# Altium PCB SerreVo_Controller_PCB ASCII REV 1.01.PcbDoc
Units mm, origin at the board's own origin, x right, y up, seen from the top; angles counter-clockwise.
Board outline 123.57 x 47.3 mm, 2 copper layers (Top, Bottom), stack 1.54 mm thick; 72 components, 49 nets, 284 pads, 147 vias.
Unrouted connection lines stored in the file: 24.
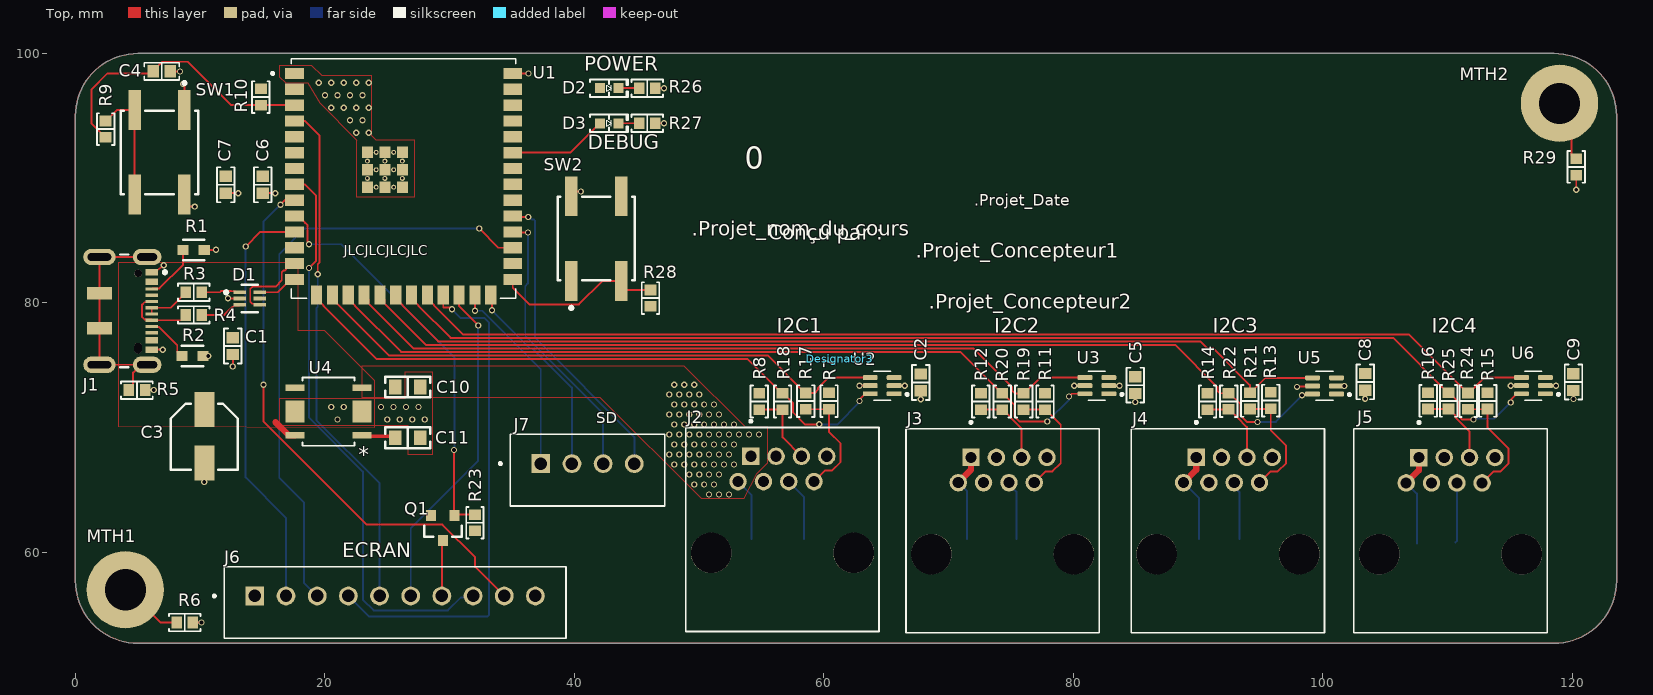
[diagram p0: Top view]
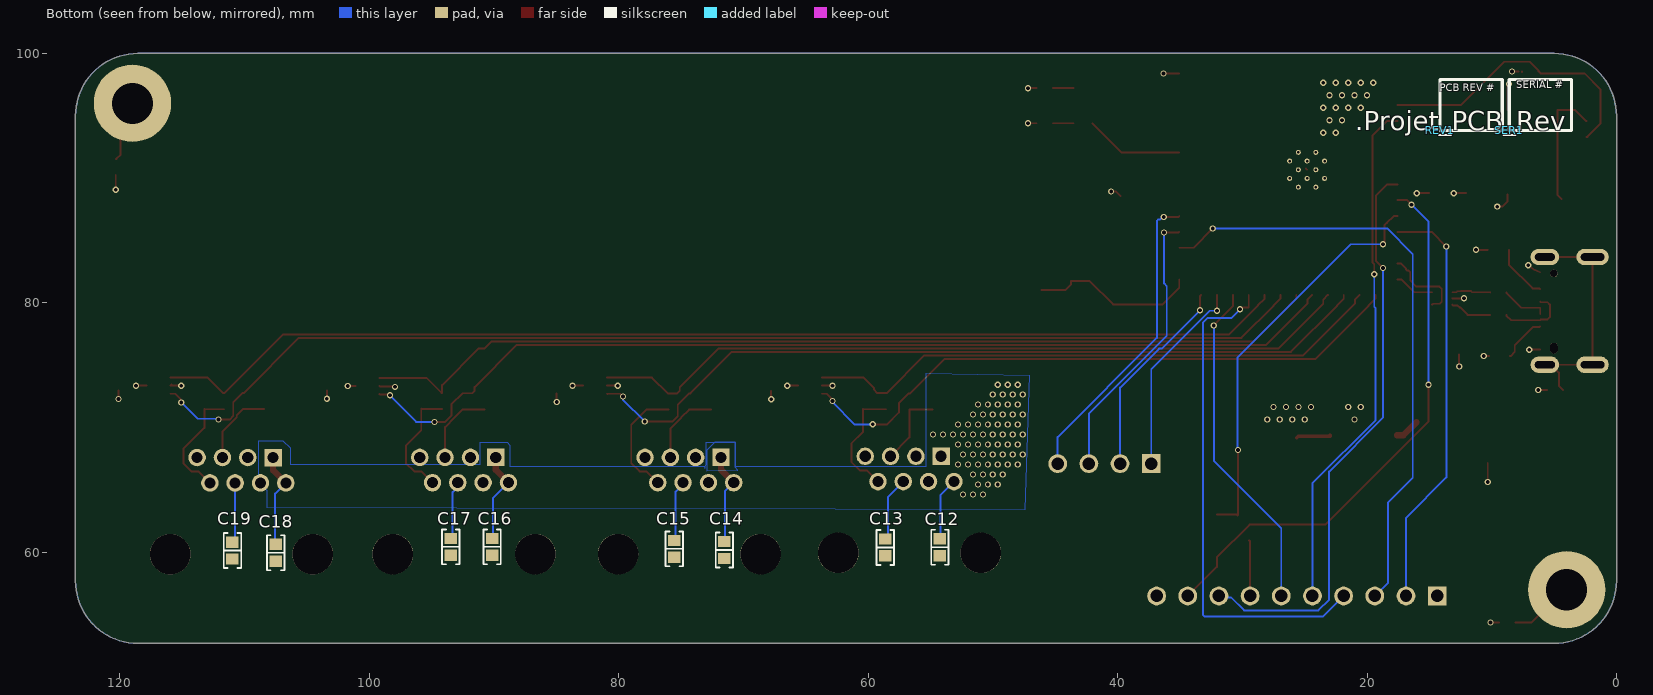
[diagram p1: Bottom view, seen from below]

## Layer stack, top to bottom
Top Solder: solder mask 0.0102, Solder Resist, Dk 3.5
Top: signal copper 0.035
Dielectric 1: core 1.47, FR-4, Dk 4.6
Bottom: signal copper 0.035
Bottom Solder: solder mask 0.0102, Solder Resist, Dk 3.5

## Board outline
0,57.705 0,95 cw(c5,95) 5,100 118.571,100 cw(c118.571,95) 123.571,95 123.571,57.705 cw(c118.571,57.705) 118.571,52.705 5,52.705 cw(c5,57.705)

## Design rules (kind name [scope] priority, off if disabled: settings)
AssemblyTestPointUsage [All] p0: scope1count=1 scope1_0_kind=Board scope1_0_value=Board scope2count=1 scope2_0_kind=Board scope2_0_value=Board commentlength=0
AssemblyTestpoint [All] p0: scope1count=1 scope1_0_kind=Board scope1_0_value=Board scope2count=1 scope2_0_kind=Board scope2_0_value=Board commentlength=0
BoardOutlineClearance [All] p0: scope1count=1 scope1_0_kind=Board scope1_0_value=Board scope2count=1 scope2_0_kind=Board scope2_0_value=Board commentlength=0 gap=0.2
BoardOutlineClearance [All] p1: gap=0.2 ignorepadtopadclearanceinfootprint=FALSE except(0: Arc-SplitContinuation Track-SplitContinuation SMDPad-SplitContinuation THPad-SplitContinuation Via-SplitContinuation Fill-SplitContinuation Poly-SplitContinuation Region-SplitContinuation Text-SplitContinuation)
Clearance [All] p0: scope1count=1 scope1_0_kind=Board scope1_0_value=Board scope2count=1 scope2_0_kind=Board scope2_0_value=Board commentlength=0 gap=0.152
Clearance [All] p1: gap=0.152 ignorepadtopadclearanceinfootprint=FALSE except(0: Arc-Hole Track-Hole SMDPad-Hole THPad-Hole Via-Hole Fill-Hole Poly-Hole Region-Hole Text-Hole; 0.127: Arc-Arc Arc-Track Track-Track SMDPad-Fill SMDPad-Poly SMDPad-Region; 0.2: Arc-SMDPad Track-SMDPad; 0.254: Arc-Via Track-Via Via-Via; 0.33: Arc-THPad Track-THPad; 0.5: THPad-THPad)
ComponentClearance [All] p0: scope1count=1 scope1_0_kind=Board scope1_0_value=Board scope2count=1 scope2_0_kind=Board scope2_0_value=Board commentlength=0 gap=0.102 collisioncheckmode=3
ComponentClearance "Schematic Component Clearance Constraint" [All] p0: scope1count=1 scope1_0_kind=Component scope1_0_value=REV1 scope2count=1 scope2_0_kind=Board scope2_0_value=Board commentlength=0 gap=0 collisioncheckmode=3
ComponentClearance "Schematic Component Clearance Constraint_1" [All] p0: scope1count=1 scope1_0_kind=Component scope1_0_value=SER1 scope2count=1 scope2_0_kind=Board scope2_0_value=Board commentlength=0 gap=0 collisioncheckmode=3
ComponentClearance "Schematic Component Clearance Constraint_1" [InComponent('SER1')] p1: gap=0 collisioncheckmode=3 verticalgap=0 showdistances=FALSE
ComponentClearance "Schematic Component Clearance Constraint" [InComponent('REV1')] p2: gap=0 collisioncheckmode=3 verticalgap=0 showdistances=FALSE
ComponentClearance [All] p3: gap=0.102 collisioncheckmode=3 verticalgap=0.102 showdistances=FALSE
DiffPairsRouting [All] p0: scope1count=1 scope1_0_kind=Board scope1_0_value=Board scope2count=1 scope2_0_kind=Board scope2_0_value=Board commentlength=0
FabricationTestPointUsage [All] p0: scope1count=1 scope1_0_kind=Board scope1_0_value=Board scope2count=1 scope2_0_kind=Board scope2_0_value=Board commentlength=0 valid=0 allowmultiple=FALSE
FabricationTestpoint [All] p0: scope1count=1 scope1_0_kind=Board scope1_0_value=Board scope2count=1 scope2_0_kind=Board scope2_0_value=Board commentlength=0 side=3 testpointundercomponent=TRUE minsize=1.016 maxsize=2.54 preferedsize=1.524 minholesize=0 maxholesize=1.016 preferedholesize=0.813 testpointgrid=0.025
FanoutControl Fanout_Default [All] p0: scope1count=1 scope1_0_kind=Board scope1_0_value=Board scope2count=1 scope2_0_kind=Board scope2_0_value=Board commentlength=30 // Fanout_Default (Default Rule)
FanoutControl Fanout_Small [All] p0 off: scope1count=1 scope1_0_kind=Board scope1_0_value=Board scope2count=1 scope2_0_kind=Board scope2_0_value=Board commentlength=84 // Protel DXP Scope 1 Expression Was: (CompPinCount < 5)   Fanout_Small (Default Rule)
FanoutControl Fanout_SOIC [All] p0 off: scope1count=1 scope1_0_kind=Board scope1_0_value=Board scope2count=1 scope2_0_kind=Board scope2_0_value=Board commentlength=71 // Protel DXP Scope 1 Expression Was: IsSOIC   Fanout_SOIC (Default Rule)
FanoutControl Fanout_LCC [All] p0 off: scope1count=1 scope1_0_kind=Board scope1_0_value=Board scope2count=1 scope2_0_kind=Board scope2_0_value=Board commentlength=69 // Protel DXP Scope 1 Expression Was: IsLCC   Fanout_LCC (Default Rule)
FanoutControl Fanout_BGA [All] p0 off: scope1count=1 scope1_0_kind=Board scope1_0_value=Board scope2count=1 scope2_0_kind=Board scope2_0_value=Board commentlength=69 // Protel DXP Scope 1 Expression Was: IsBGA   Fanout_BGA (Default Rule)
Height [All] p0: scope1count=1 scope1_0_kind=Board scope1_0_value=Board scope2count=1 scope2_0_kind=Board scope2_0_value=Board commentlength=0
HoleSize [All] p0: scope1count=1 scope1_0_kind=Board scope1_0_value=Board scope2count=1 scope2_0_kind=Board scope2_0_value=Board commentlength=0 absolutevalues=TRUE maxlimit=6.3 minlimit=0.3 maxpercent=80.000 minpercent=20.000
HoleSize [All] p1: absolutevalues=TRUE maxlimit=6.3 minlimit=0.3 maxpercent=80.000 minpercent=20.000
HoleToHoleClearance [All] p0: scope1count=1 scope1_0_kind=Board scope1_0_value=Board scope2count=1 scope2_0_kind=Board scope2_0_value=Board commentlength=0
HoleToHoleClearance [All] p1: gap=0.5 allowstackedmicrovias=FALSE
LayerPairs [All] p0: scope1count=1 scope1_0_kind=Board scope1_0_value=Board scope2count=1 scope2_0_kind=Board scope2_0_value=Board commentlength=0 enforce=TRUE
MinimumAnnularRing [All] p0: scope1count=1 scope1_0_kind=Board scope1_0_value=Board scope2count=1 scope2_0_kind=Board scope2_0_value=Board commentlength=0 minimumring=0.1
MinimumAnnularRing [All] p1: minimumring=0.1
MinimumSolderMaskSliver [All] p0: scope1count=1 scope1_0_kind=Board scope1_0_value=Board scope2count=1 scope2_0_kind=Board scope2_0_value=Board commentlength=0
MinimumSolderMaskSliver [All] p1: minsoldermaskwidth=0.1
NetAntennae [All] p0: scope1count=1 scope1_0_kind=Board scope1_0_value=Board scope2count=1 scope2_0_kind=Board scope2_0_value=Board commentlength=0
PasteMaskExpansion [All] p0: scope1count=1 scope1_0_kind=Board scope1_0_value=Board scope2count=1 scope2_0_kind=Board scope2_0_value=Board commentlength=0 expansion=0
PlaneClearance [All] p0: scope1count=1 scope1_0_kind=Board scope1_0_value=Board scope2count=1 scope2_0_kind=Board scope2_0_value=Board commentlength=0 clearance=0.152
PlaneClearance [All] p1: clearance=0.152
PlaneConnect [All] p0: scope1count=1 scope1_0_kind=Board scope1_0_value=Board scope2count=1 scope2_0_kind=Board scope2_0_value=Board commentlength=0 planeconnectstyle=Relief reliefexpansion=0.508 reliefentries=4 reliefconductorwidth=0.254 reliefairgap=0.254
PlaneConnect [All] p1: pad.planeconnectstyle=Relief pad.reliefexpansion=0.508 pad.reliefentries=4 pad.reliefconductorwidth=0.254 pad.reliefairgap=0.254 via.planeconnectstyle=Direct via.reliefexpansion=0.508 via.reliefentries=4 via.reliefconductorwidth=0.254 via.reliefairgap=0.254
PolygonConnect [All] p0: scope1count=1 scope1_0_kind=Board scope1_0_value=Board scope2count=1 scope2_0_kind=Board scope2_0_value=Board commentlength=0 connectstyle=Relief reliefconductorwidth=0.254 reliefentries=4 polygonreliefangle="90 Angle"
PolygonConnect [All] p1: thpad.connectstyle=Relief thpad.reliefconductorwidth=0.254 thpad.reliefentries=4 thpad.polygonreliefangle="90 Angle" thpad.airgapwidth=0.254 smdpad.connectstyle=Direct smdpad.reliefconductorwidth=0.254 smdpad.reliefentries=4 smdpad.polygonreliefangle="90 Angle" smdpad.airgapwidth=0.254 via.connectstyle=Direct via.reliefconductorwidth=0.254 via.reliefentries=4 via.polygonreliefangle="90 Angle" via.airgapwidth=0.254
RoutingCorners [All] p0: scope1count=1 scope1_0_kind=Board scope1_0_value=Board scope2count=1 scope2_0_kind=Board scope2_0_value=Board commentlength=0 cornerstyle=45-Degree minsetback=2.54 maxsetback=2.54
RoutingLayers [All] p0: scope1count=1 scope1_0_kind=Board scope1_0_value=Board scope2count=1 scope2_0_kind=Board scope2_0_value=Board commentlength=0 top layer=Automatic bottom layer=Automatic
RoutingPriority [All] p0: scope1count=1 scope1_0_kind=Board scope1_0_value=Board scope2count=1 scope2_0_kind=Board scope2_0_value=Board commentlength=0
RoutingTopology [All] p0: scope1count=1 scope1_0_kind=Board scope1_0_value=Board scope2count=1 scope2_0_kind=Board scope2_0_value=Board commentlength=0 topology=Shortest
RoutingVias [All] p0: scope1count=1 scope1_0_kind=Board scope1_0_value=Board scope2count=1 scope2_0_kind=Board scope2_0_value=Board commentlength=0 holewidth=0.3 width=0.5 viastyle="Through Hole" minholewidth=0.3 minwidth=0.5 maxholewidth=6.3 maxwidth=6.5
RoutingVias [All] p1: holewidth=0.3 width=0.5 viastyle="Through Hole" minholewidth=0.3 minwidth=0.5 maxholewidth=6.3 maxwidth=6.5
ShortCircuit [All] p0: scope1count=1 scope1_0_kind=Board scope1_0_value=Board scope2count=1 scope2_0_kind=Board scope2_0_value=Board commentlength=0 allowed=FALSE
SilkToBoardRegionClearance [All] p0: scope1count=1 scope1_0_kind=Board scope1_0_value=Board scope2count=1 scope2_0_kind=Board scope2_0_value=Board commentlength=0
SilkToSilkClearance [All] p0: scope1count=1 scope1_0_kind=Board scope1_0_value=Board scope2count=1 scope2_0_kind=Board scope2_0_value=Board commentlength=0
SilkToSilkClearance [All] p1: silktosilkclearance=0.102
SilkToSolderMaskClearance [All] p0 off: scope1count=1 scope1_0_kind=Board scope1_0_value=Board scope2count=1 scope2_0_kind=Board scope2_0_value=Board commentlength=44 // Protel DXP Scope 1 Expression Was: IsPad
SilkToSolderMaskClearance [IsPad] p1: minsilkscreentomaskgap=0.024 clearancetoexposedcopper=FALSE
SolderMaskExpansion [All] p0: scope1count=1 scope1_0_kind=Board scope1_0_value=Board scope2count=1 scope2_0_kind=Board scope2_0_value=Board commentlength=0 expansion=0.051
SolderMaskExpansion SolderMaskExpansion_Via [All] p0 off: scope1count=1 scope1_0_kind=Board scope1_0_value=Board scope2count=1 scope2_0_kind=Board scope2_0_value=Board commentlength=44 expansion=0.102 // Protel DXP Scope 1 Expression Was: isVia
SolderMaskExpansion SolderMaskExpansion_Via [isVia] p1: expansion=0.102 istentingtop=TRUE
SolderMaskExpansion [All] p2: expansion=0.051 istentingtop=FALSE
UnRoutedNet [All] p0: scope1count=1 scope1_0_kind=Board scope1_0_value=Board scope2count=1 scope2_0_kind=Board scope2_0_value=Board commentlength=0
UnpouredPolygon [All] p0: scope1count=1 scope1_0_kind=Board scope1_0_value=Board scope2count=1 scope2_0_kind=Board scope2_0_value=Board commentlength=0
Width [All] p0: scope1count=1 scope1_0_kind=Board scope1_0_value=Board scope2count=1 scope2_0_kind=Board scope2_0_value=Board commentlength=0 maxlimit=25.4 minlimit=0.127 preferedwidth=0.152
Width [All] p1: maxlimit=25.4 minlimit=0.127 preferedwidth=0.152 minimp=50.000000 maximp=50.000000 favimp=50.000000
22 further rules are at their usual default settings.

## Classes and differential pairs
component class TEMPLATE_Connectors: C1 C3 D1 J1 MTH1 MTH2 R1 R2 R3 R4 R5 R6 R29
component class TEMPLATE_Circuit: C2 C4 C5 C6 C7 C9 C10 C11 D2 D3 J2 J3 J4 J5 J6 J7 Q1 R7 R8 R9 R10 R11 R12 R13 R14 R15 R16 R17 R18 R19 R20 R21 R22 R23 R24 R25 R26 SW1 SW2 U1 U2 U3 U4 U5 U6
component class TEMPLATE_Title: REV1 SER1

## Components (designator, comment, footprint, x,y, rotation, side; value= is the part's Value field where it differs from the comment)
C1 "0.1 µF" "CAP 0603_1608" 12.619,76.531 r90 top
C2 "0.012 µF" "CAP 0603_1608" 67.787,73.627 r90 top
C3 "100 µF" "CAP ALSMD 5.3MM H5.4MM" 10.331,69.312 r270 top
C4 "1 µF" "CAP 0603_1608" 6.921,98.558 r0 top
C5 "0.012 µF" "CAP 0603_1608" 84.984,73.4 r90 top
C6 "22µF" "CAP 0603_1608" 15.029,89.474 r90 top
C7 "0.1 µF" "CAP 0603_1608" 12.055,89.474 r90 top
C8 "0.012 µF" "CAP 0603_1608" 103.411,73.67 r90 top
C9 "0.012 µF" "CAP 0603_1608" 120.116,73.649 r90 top
C10 "4.7 µF" "MURATA GRM188 0603_1608" 26.644,69.185 r0 top
C11 "4.7 µF" "MURATA GRM188 0603_1608" 26.644,73.259 r180 top
C12 "47µF" "CAP 0603_1608" 54.254,60.405 r90 bottom
C13 "47µF" "CAP 0603_1608" 58.63,60.395 r90 bottom
C14 "47µF" "CAP 0603_1608" 71.532,60.184 r90 bottom
C15 "47µF" "CAP 0603_1608" 75.552,60.282 r90 bottom
C16 "47µF" "CAP 0603_1608" 90.166,60.44 r90 bottom
C17 "47µF" "CAP 0603_1608" 93.466,60.44 r90 bottom
C18 "47µF" "CAP 0603_1608" 107.508,59.965 r90 bottom
C19 "47µF" "CAP 0603_1608" 110.98,60.139 r90 bottom
D1 "USBLC6-2P6" FP-SOT-666-MFG 13.983,80.355 r0 top
D2 "Green" "LED 0603_1608 GREEN" 42.793,97.215 r0 top
D3 "Red" "LED 0603_1608 RED" 42.793,94.402 r0 top
Designator3 "Comment" STN_STENCIL_TOP_PASTE_181x280 61.271,75.512 r90 top
J1 "Usb-C" FP-DX07S016JA1R1500-MFG 2.921,79.359 r270 top
J2 "SS-60000-007" BEL_SS-60000-007 56.689,65.669 r0 top
J3 "SS-60000-007" BEL_SS-60000-007 74.344,65.583 r0 top
J4 "SS-60000-007" BEL_SS-60000-007 92.408,65.583 r0 top
J5 "SS-60000-007" BEL_SS-60000-007 110.259,65.566 r0 top
J6 "B10B-XH-A(LF)(SN)" JST_B10B-XH-A(LF)(SN) 25.632,55.975 r180 top
J7 "B4B-XH-A" JST_B4B-XH-A 41.063,66.589 r180 top
MTH1 "MTH_M3" MTH_M3#1 4.064,57.15 r0 top
MTH2 "MTH_M3" MTH_M3#2 119.613,96.02 r0 top
Q1 "DMP6350S-7" FP-SOT23-MFG 29.457,61.955 r270 top
R1 "5.1kohms" FP-AC0603-MFG 9.481,84.251 r0 top
R2 "5.1kohms" FP-AC0603-MFG 9.383,75.74 r0 top
R3 "30 Ohms" "RES 0603_1608" 9.481,80.847 r0 top
R4 "30 Ohms" "RES 0603_1608" 9.481,79.032 r0 top
R5 "0 Ohms" "RES 0603_1608" 4.931,73.005 r0 top
R6 "0 Ohms" "RES 0603_1608" 8.766,54.368 r0 top
R7 "330 Ohms" "RES 0603_1608" 60.428,72.128 r90 top
R8 "330 Ohms" "RES 0603_1608" 54.835,72.094 r90 top
R9 "330 Ohms" "RES 0603_1608" 2.421,93.934 r90 top
R10 "10 kOhms" "RES 0603_1608" 14.87,96.504 r270 top
R11 "330 Ohms" "RES 0603_1608" 77.739,72.094 r90 top
R12 "330 Ohms" "RES 0603_1608" 72.601,72.094 r90 top
R13 "330 Ohms" "RES 0603_1608" 95.842,72.168 r90 top
R14 "330 Ohms" "RES 0603_1608" 90.777,72.094 r90 top
R15 "330 Ohms" "RES 0603_1608" 113.237,72.14 r90 top
R16 "330 Ohms" "RES 0603_1608" 108.463,72.14 r90 top
R17 "30 Ohms" "RES 0603_1608" 58.564,72.123 r90 top
R18 "30 Ohms" "RES 0603_1608" 56.7,72.094 r90 top
R19 "30 Ohms" "RES 0603_1608" 76.027,72.094 r90 top
R20 "30 Ohms" "RES 0603_1608" 74.314,72.094 r90 top
R21 "30 Ohms" "RES 0603_1608" 94.17,72.14 r90 top
R22 "30 Ohms" "RES 0603_1608" 92.469,72.107 r90 top
R23 "10 kOhms" "RES 0603_1608" 32.033,62.369 r270 top
R24 "30 Ohms" "RES 0603_1608" 111.672,72.123 r90 top
R25 "30 Ohms" "RES 0603_1608" 110.102,72.14 r90 top
R26 "220 Ohms" "RES 0603_1608" 45.847,97.215 r180 top
R27 "470 Ohms" "RES 0603_1608" 45.847,94.402 r180 top
R28 "10 kOhms" "RES 0603_1608" 46.109,80.384 r90 top
R29 "0 Ohms" "RES 0603_1608" 120.344,90.898 r90 top
REV1 "Revision Cartridge Mini" REV_REVISION_CARTRIDGE_MINI 14.17,93.831 r180 bottom
SER1 "Serial Cartridge MICRO" SER_SERIAL_CARTRIDGE_MICRO 8.609,93.831 r180 bottom
SW1 "EVQ-Q2U01W" FP-EVQ-Q2U01W-MFG 6.738,92.074 r270 top
SW2 "EVQ-Q2U01W" FP-EVQ-Q2U01W-MFG 41.756,85.15 r90 top
U1 "ESP32-S3-WROOM-1U-N16R8" XCVR_ESP32-S3-WROOM-1U-N16R8 26.316,89.984 r0 top
U2 "LTC4311ISC6#TRPBF" SOT65P210X100-6N 64.684,73.363 r180 top
U3 "LTC4311ISC6#TRPBF" SOT65P210X100-6N 81.905,73.363 r180 top
U4 "R1172S331B-E2-FE" HSOP-6_FH006-A-P-SD-2.1_ABL 20.289,71.288 r180 top
U5 "LTC4311ISC6#TRPBF" SOT65P210X100-6N 100.153,73.342 r180 top
U6 "LTC4311ISC6#TRPBF" SOT65P210X100-6N 116.907,73.363 r180 top

## Footprints (in the part's own frame and the unit in brackets; to place one, negate y for a bottom-side part, rotate by r counter-clockwise, add the part's x,y. Pads: shape width x height; smd on the part's side, far side on the other; paste and mask are expansions set on the pad)
BEL_SS-60000-007 [mm]
  rect 1.398x1.398 hole 0.89: 1(-2.535,2.03)
  round 1.398 hole 0.89: 2(-3.555,0) 3(-1.525,0) 4(0.505,0) 5(-0.505,2.03) 6(1.525,2.03) 7(3.555,2.03) 8(2.535,0)
  round 3.25 hole 3.25 unplated: ""(-5.715,-5.72) ""(5.715,-5.72)
  silkscreen extent -7.75,-12.02 7.74,4.94
"CAP 0603_1608" [mm] "Chip Capacitor, 2-Leads, Body 1.60x0.80mm, IPC Medium Density"
  rect 0.9x1 smd: 1(-0.675,0) 2(0.675,0)
  silkscreen extent -1.4,-0.7 1.4,0.7
"CAP ALSMD 5.3MM H5.4MM" [mm] "Aluminum Electrolytic Capacitor, Body 5.30x5.30x5.40mm, IPC Low Density"
  rect 2.8x1.6 smd: 1(-2.15,0) 2(2.15,0)
  silkscreen extent -2.6,-2.7 2.7,2.7
FP-AC0603-MFG [mm]
  rect 0.9x0.8 smd paste+0 mask+0: 1(-0.85,0) 2(0.85,0)
  silkscreen extent -0.85,-0.83 0.85,0.82
FP-DX07S016JA1R1500-MFG [mm]
  rrect100% 1.3x2.3 hole 1.6 slot 0.6 at 0 deg paste-1000 mask+0: 1(-4.32,2.825) 2(4.32,2.825)
  rrect100% 1.3x2.6 hole 1.9 slot 0.6 at 0 deg paste-1000 mask+0: 3(-4.32,-1) 6(4.32,-1)
  rect 1x2 smd paste+0 mask+0: 4(-1.4,-1) 5(1.4,-1)
  rect 0.52x1 smd paste+0 mask+0: A1/B12(-3.1,3.2) A4/B9(-2.35,3.2) A12/B1(3.1,3.2) B4/A9(2.35,3.2)
  rect 0.27x1 smd paste+0 mask+0: A5(-1.75,3.2) A6(-0.25,3.2) A7(0.75,3.2) A8(1.75,3.2) B5(1.25,3.2) B6(0.25,3.2) B7(-0.75,3.2) B8(-1.25,3.2)
  round 0.6 hole 0.6 unplated paste-1000 mask+0: ""(-3,2.1)
  rrect100% 0.85x0.6 hole 0.6 slot 0.85 at 0 deg unplated paste-1000 mask+0: ""(3,2.1)
  silkscreen extent -4.52,0.67 4.52,4.38
FP-EVQ-Q2U01W-MFG [mm]
  rect 3.2x1 smd paste+0 mask+0: A(-3.4,2) A'(3.4,2) B(-3.4,-2) B'(3.4,-2)
  silkscreen extent -5.67,-3.1 3.35,3.1
FP-SOT23-MFG [mm]
  rect 0.9x0.8 smd paste+0 mask+0: 1(-1,0.95) 2(-1,-0.95) 3(1,0)
  silkscreen extent -0.18,-1.5 0.7,1.5
FP-SOT-666-MFG [mm]
  rect 0.99x0.3 smd paste+0 mask+0: 1(-0.805,0.5) 2(-0.805,0) 3(-0.805,-0.5) 4(0.805,-0.5) 5(0.805,0) 6(0.805,0.5)
  silkscreen extent -2.02,-1.1 0.65,1.1
HSOP-6_FH006-A-P-SD-2.1_ABL [mil]
  rect 60x20 smd paste+0 mask+0: 1(-106,75.2) 3(-106,-75.2) 4(106,-75.2) 6(106,75.2)
  rect 60x70 smd paste+0 mask+0: 2(-106,0) 5(106,0)
  silkscreen extent -82,-108 82,108
JST_B4B-XH-A [mm]
  rect 1.508x1.508 / inner round 1.508 / far side rect 1.508x1.508 hole 1: 1(3.75,-0.525)
  round 1.508 hole 1: 2(1.25,-0.525) 3(-1.25,-0.525) 4(-3.75,-0.525)
  silkscreen extent -6.2,-2.88 7.1,2.87
JST_B10B-XH-A(LF)(SN) [mm]
  rect 1.508x1.508 / inner round 1.508 / far side rect 1.508x1.508 hole 1: 1(11.25,-0.525)
  round 1.508 hole 1: 2(8.75,-0.525) 3(6.25,-0.525) 4(3.75,-0.525) 5(1.25,-0.525) 6(-1.25,-0.525) 7(-3.75,-0.525) 8(-6.25,-0.525) 9(-8.75,-0.525) 10(-11.25,-0.525)
  silkscreen extent -13.7,-2.87 14.6,2.88
"LED 0603_1608 GREEN" [mm] "Chip Diode, 2-Leads, Body 1.60x0.80mm, IPC Medium Density"
  rect 0.8x0.8 smd: 1(-0.75,0) 2(0.75,0)
  silkscreen extent -1.52,-0.7 1.52,0.7
"LED 0603_1608 RED" [mm] "Chip Diode, 2-Leads, Body 1.60x0.80mm, IPC Medium Density"
  rect 0.8x0.8 smd: 1(-0.75,0) 2(0.75,0)
  silkscreen extent -1.52,-0.7 1.52,0.7
MTH_M3#1 [mm] "Mounting Hole Metric M3"
  round 6.2 hole 3.3 paste-7.62 mask+0: 1(-0.064,-0.15)
MTH_M3#2 [mm] "Mounting Hole Metric M3"
  round 6.2 hole 3.3 paste-7.62 mask+0: 1(-0.613,-0.02)
"MURATA GRM188 0603_1608" [mm] "Chip Capacitor, 2-Leads, Body 1.60x0.80mm"
  rect 1x1.2 smd: 1(-1,0) 2(1,0)
  silkscreen extent -1.8,-0.82 1.8,0.82
"RES 0603_1608" [mm] "Chip Resistor, 2-Leads, Body 1.60x0.80mm, IPC Medium Density"
  rect 0.85x0.95 smd: 1(-0.65,0) 2(0.65,0)
  silkscreen extent -1.27,-0.7 1.27,0.7
REV_REVISION_CARTRIDGE_MINI [mm]
  silkscreen extent 0,0 5,4.08
SER_SERIAL_CARTRIDGE_MICRO [mm]
  silkscreen extent 0,0 5,4.08
SOT65P210X100-6N [mm]
  rrect50% 1.19x0.4 smd: 1(-0.96,0.65) 2(-0.96,0) 3(-0.96,-0.65) 4(0.96,-0.65) 5(0.96,0) 6(0.96,0.65)
  silkscreen extent -2.1,-1.16 0.68,1.16
STN_STENCIL_TOP_PASTE_181x280 [mm]
XCVR_ESP32-S3-WROOM-1U-N16R8 [mm]
  rect 1.5x0.9 smd: 1(-8.75,8.41) 2(-8.75,7.14) 3(-8.75,5.87) 4(-8.75,4.6) 5(-8.75,3.33) 6(-8.75,2.06) 7(-8.75,0.79) 8(-8.75,-0.48) 9(-8.75,-1.75) 10(-8.75,-3.02) 11(-8.75,-4.29) 12(-8.75,-5.56) 13(-8.75,-6.83) 14(-8.75,-8.1) 27(8.75,-8.1) 28(8.75,-6.83) 29(8.75,-5.56) 30(8.75,-4.29) 31(8.75,-3.02) 32(8.75,-1.75) 33(8.75,-0.48) 34(8.75,0.79) 35(8.75,2.06) 36(8.75,3.33) 37(8.75,4.6) 38(8.75,5.87) 39(8.75,7.14) 40(8.75,8.41)
  rect 0.9x1.5 smd: 15(-6.985,-9.35) 16(-5.715,-9.35) 17(-4.445,-9.35) 18(-3.175,-9.35) 19(-1.905,-9.35) 20(-0.635,-9.35) 21(0.635,-9.35) 22(1.905,-9.35) 23(3.175,-9.35) 24(4.445,-9.35) 25(5.715,-9.35) 26(6.985,-9.35)
  rect 0.9x0.9 smd: 41_1(-2.9,2.09) 41_2(-1.5,2.09) 41_3(-0.1,2.09) 41_4(-2.9,0.69) 41_5(-1.5,0.69) 41_6(-0.1,0.69) 41_7(-2.9,-0.71) 41_8(-1.5,-0.71) 41_9(-0.1,-0.71)
  round 0.4 hole 0.2 mask+0: 41_10(-2.2,2.09) 41_11(-0.8,2.09) 41_12(-2.9,1.39) 41_13(-1.5,1.39) 41_14(-0.1,1.39) 41_15(-2.2,0.69) 41_16(-0.8,0.69) 41_17(-2.9,-0.01) 41_18(-1.5,-0.01) 41_19(-0.1,-0.01) 41_20(-2.2,-0.71) 41_21(-0.8,-0.71)
  silkscreen extent -10.6,-9.6 9,9.6

## Part data
C1: library part KGM15AR71C104MM, "CAP CER 0.1UF 16V X7R 0603"
C2 C5 C8 C9: library part CC0603KRX7R7BB123, "CAP CER 0.012UF 16V X7R 0603"
C3: library part EEE-1AA101WR, "CAP ALUM 100UF 20% 10V SMD"
C4: library part C0603X105M4RACAUTO, "CAP CER 1UF 16V X7R 0603"
C6: library part 06036D226MAT2A, "CAP CER 22UF 6.3V X5R 0603"
C7: library part C0603C104M4RAC7411, "CAP CER 0.1UF 16V X7R 0603"
C10 C11: library part GRM188C81C475KE11D, "CAP CER 4.7UF 16V X6S 0603"
C12 C13 C14 C15 C16 C17 C18 C19: library part 06036D476MAT2A, "CAP CER 47UF 6.3V X5R 0603"
D1: library part CMP-12225-000058-1, "TVS DIODE 5.25V 17V SOT666"
D2: library part SML-D12P8WT86, "LED GREEN DIFFUSED 0603 SMD"
D3: library part SML-D12U1WT86, "LED RED DIFFUSED 1608 SMD"
J1: library part CMP-19038-000003-1, "CONN RCP USB2.0 TYP C 24P SMD RA"
J2 J3 J4 J5: "Jack Modular Connector 8p8c _RJ45, Ethernet_ Vertical Unshielded Cat6"
J6: "Connector Header Through Hole 10 position 0.098 (2.50mm)"
MTH1 MTH2: library part CMP-006-000008-1, "MTH - MOUNTING HOLE M3 PLATED - M3"
Q1: library part CMP-12801-000018-2, "MOSFET P-CHA 60V 720MW SOT23"
R1 R2: library part CMP-03412-025080-2, "RES 5.1KO 1.00% 0.1W 0603"
R3 R4 R17 R18 R19 R20 R21 R22 R24 R25: library part ESR03EZPJ300, "RES SMD 30 OHM 5% 1/4W 0603"
R5 R6 R29: library part CR0603AJ/-000EAS, "RESA-AS 0603 0R JUMPER 100MW"
R7 R8 R9 R11 R12 R13 R14 R15 R16: library part CRGH0603F330R, "RES SMD 330 OHM 1% 1/5W 0603"
R10 R23 R28: library part RCS060310K0JNEA, "RES SMD 10K OHM 5% 1/4W 0603"
R26: library part CR0603-FX-2200ELF, "RES SMD 220 OHM 1% 1/10W 0603"
R27: library part ERJ-3EKF4700V, "RES SMD 470 OHM 1% 1/10W 0603"
REV1: library part REV_REVISION_CARTRIDGE_MINI, "REV - REVISION CARTRIDGE MINI"
SER1: library part SER_SERIAL_CARTRIDGE_MICRO, "SER - SERIAL CARTRIDGE MICRO"
SW1 SW2: library part CMP-05618-000050-1, "SWITCH TACTILE SPST-NO 0.02A 15V"
U1: "Bluetooth, WiFi 802.11b/g/n, Bluetooth v5.0 Transceiver Module 2.4GHz Antenna Not Included, U.FL Surface Mount"
U2 U3 U5 U6: "Low Voltage I2C/SMBus Accelerator"
U4: library part S-1172B33-E6T1U, "No Description Available"

## Via types
v1: diameter 0.5, hole 0.3, Top to Bottom, tented both sides, 147 vias

## Nets (pads, with @x,y where several pads share a name; then routed paths per layer and width w, separated by ;. In a path a pad name is that pad's centre, name@x,y a point inside that pad or via, vN(x,y) a via of type N, cw(c..) or ccw(c..) an arc to the next point about the centre after c; other vN are vias at no path point)
3V3: C2.2 C5.2 C6.2 C7.2 C8.2 C9.2 C10.1 C13.2 C15.2 C17.2 C19.2 D2.1 J2.3 J2.4 J3.3 J3.4 J4.3 J4.4 J5.3 J5.4 J6.1 Q1.2 R7.2 R8.2 R10.1 R11.2 R12.2 R13.2 R14.2 R15.2 R16.2 R23.2 R28.1 U1.2 U2.1 U2.3 U3.1 U3.3 U4.1 U5.1 U5.3 U6.1 U6.3 | length 22.1
  Top w0.3: U4.1 22.957,69.312 25.517,69.312 C10.1
  Bottom w0.152: J2.4 58.431,64.432 C13.2@58.431,61.08 ; J3.4 74.849,65.455 75.441,64.863 C15.2@75.441,61.08 ; J4.4 92.913,65.246 93.325,64.833 C17.2@93.325,61.08 ; C19.2@110.656,60.795 110.764,60.903 J5.4
BOOT_MCU: R28.2 SW2.B U1.27 | length 13.5
  Top w0.152: U1.27 35.066,81.206 36.397,79.874 40.371,79.874 42.247,81.75 SW2.B 43.756,81.458 44.18,81.034 R28.2
Debug: D3.1 U1.35 | length 8
  Top w0.152: U1.35 39.685,92.044 D3.1
EN: C4.1 R9.1 R10.2 U1.3 | length 23
  Top w0.152: R9.1 2.391,93.314 2.341,93.314 1.271,94.384 1.271,97.096 2.57,98.394 6.082,98.394 C4.1 6.246,98.608 6.972,99.334 9.011,99.334 12.491,95.854 R10.2 U1.3
GND: C1.1 C2.1 C3.2 C4.2 C5.1 C6.1 C7.1 C8.1 C9.1 C10.2 C11.1 C12.1 C13.1 C14.1 C15.1 C16.1 C17.1 C18.1 C19.1 D1.2 J1.A1/B12 J1.A12/B1 J2.5 J2.7 J3.5 J3.7 J4.5 J4.7 J5.5 J5.7 J6.10 R1.2 R2.2 R5.2 R6.2 R26.1 R27.1 R29.1 SW1.A SW1.A' SW2.A' U1.1 U1.40 U1.41_1 U1.41_2 U1.41_3 U1.41_4 U1.41_5 U1.41_6 U1.41_7 U1.41_8 U1.41_9 U2.2 U2.5 U3.2 U3.5 U4.2 U4.5 U5.2 U5.5 U6.2 U6.5 | length 29.3
  Top w0.152: R5.2 v1(6.281,73.005) ; J1.A12/B1 6.971,76.259 v1(6.996,76.234) ; J1.A1/B12 6.545,82.643 6.738,82.744 ccw(c6.246,83.679) v1(7.075,83.025) ; C4.2@7.596,98.508 C4.2 ; C4.2@7.874,98.552 v1(8.382,98.552) ; v1@8.545,97.559 v1(8.631,97.559) 8.738,97.452 SW1.A ; SW1.A' 8.738,88.142 9.161,87.718 v1(9.567,87.718) ; R6.2 v1(10.116,54.368) ; R2.2 v1(10.655,75.74) ; v1(10.331,65.637) C3.2 ; R1.2 v1(11.27,84.251) ; C7.1 v1(13.061,88.799) ; v1(12.234,80.372) 12.243,80.364 13.169,80.364 D1.2 ; v1(12.619,74.895) C1.1 ; C6.1 v1(16.023,88.799) ; U1.41_5 U1.41_5@24.91,90.768 ; U1.40 v1(36.322,98.394) ; SW2.A' 40.133,88.927 v1(40.527,88.927) ; R27.1 v1(47.197,94.402) ; R26.1 v1(47.197,97.215) ; v1(62.874,73.363) U2.5 ; U2.2 v1(66.494,73.363) ; v1(67.787,72.277) C2.1 ; v1(80.095,73.363) U3.5 ; U3.2 v1(83.715,73.363) ; v1(84.984,72.05) C5.1 ; v1(97.941,73.265) 97.98,73.303 99.154,73.303 U5.5 ; U5.2 v1(101.739,73.342) ; v1(103.411,72.32) C8.1 ; v1(115.097,73.363) U6.5 U6.5@115.847,73.463 ; U6.2 v1(118.717,73.363) ; v1(120.116,72.299) C9.1 ; v1(120.344,89.068) R29.1
  other v1: 21.009,70.644 25.009,70.644 26.009,70.644 27.009,70.644 28.009,70.644 20.509,71.644 21.509,71.644 24.509,71.644 25.509,71.644 26.509,71.644 27.509,71.644 22.509,93.644 23.509,93.644 22.009,94.644 23.009,94.644 20.509,95.644 21.509,95.644 22.509,95.644 23.509,95.644 20.009,96.644 21.009,96.644 22.009,96.644 23.009,96.644 19.509,97.644 20.509,97.644 21.509,97.644 22.509,97.644 23.509,97.644
NetD2_2: D2.2 R26.2 | length 1.7
  Top w0.152: D2.2 R26.2
NetD3_2: D3.2 R27.2 | length 1.7
  Top w0.152: D3.2 R27.2
NetJ1_1: J1.1 J1.2 J1.3 J1.4 J1.5 J1.6 R5.1 | length 18.7
  Top w0.152: R5.1 4.63,73.354 4.63,74.413 J1.2@5.256,75.039 ; J1.2 J1.2@5.256,75.039 ; J1.1 J1.3 J1.4 J1.5 J1.6 J1.2@5.256,75.039
NetJ1_A5: J1.A5 R1.1 | length 4.5
  Top w0.152: J1.A5 6.18,81.168 6.73,81.168 8.631,83.068 R1.1
NetJ1_A6: J1.A6 J1.B6 R3.1 | length 3.8
  Top w0.152: J1.B6 J1.A6 7.643,79.609 8.831,80.797 R3.1
NetJ1_A7: J1.A7 J1.B7 R4.1 | length 5.7
  Top w0.152: J1.B7 6.062,80.05 5.537,80.05 5.345,79.858 5.345,78.86 5.537,78.668 6.062,78.668 J1.A7 8.458,78.609 8.831,78.982 R4.1
NetJ1_B5: J1.B5 R2.1 | length 3.7
  Top w0.152: J1.B5 6.18,78.05 6.705,78.05 8.159,76.596 8.159,76.064 8.483,75.74 R2.1
NetJ2_6: J2.6 R8.1 R18.1 | length 6.2
  Top w0.152: R8.1 R18.1 56.7,69.213 J2.6
NetJ2_8: J2.8 R7.1 R17.1 | length 9.3
  Top w0.152: R17.1 60.423,71.473 R7.1 60.428,69.646 61.349,68.725 61.349,67.241 60.682,66.574 60.129,66.574 J2.8
NetJ3_6: J3.6 R12.1 R20.1 | length 6.2
  Top w0.152: R12.1 R20.1 74.364,71.444 74.996,70.812 74.996,70.789 75.869,69.916 J3.6
NetJ3_8: J3.8 R11.1 R19.1 | length 9.3
  Top w0.152: R19.1 R11.1 77.789,71.444 79.004,70.229 79.004,67.155 78.337,66.488 77.784,66.488 J3.8
NetJ4_6: J4.6 R14.1 R22.1 | length 6.2
  Top w0.152: R14.1 92.469,71.444 92.506,71.444 92.519,71.457 93.139,70.836 93.139,70.834 93.933,70.041 J4.6
NetJ4_8: J4.8 R13.1 R21.1 | length 9.3
  Top w0.152: R21.1 95.814,71.49 R13.1 95.842,69.775 97.068,68.549 97.068,67.155 96.401,66.488 95.848,66.488 J4.8
NetJ5_6: J5.6 R16.1 R25.1 | length 6.3
  Top w0.152: R16.1 R25.1 110.152,71.49 110.641,71.001 110.641,70.817 111.784,69.674 J5.6
NetJ5_8: J5.8 R15.1 R24.1 | length 9.4
  Top w0.152: R24.1 113.22,71.473 R15.1 113.237,69.981 114.92,68.298 114.92,67.138 114.253,66.472 113.7,66.472 J5.8
NetMTH1_1: MTH1.1 R6.1 | length 5.2
  Top w0.152: MTH1.1@4.064,57.15 6.846,54.368 R6.1
NetMTH2_1: MTH2.1 R29.2 | length 5
  Top w0.152: MTH2.1 119.945,95.055 119.945,91.897 120.294,91.548 R29.2
NetR9_2: R9.2 SW1.B SW1.B' | length 10
  Top w0.152: R9.2 2.471,94.584 3.361,95.474 SW1.B SW1.B' SW1.B'@4.392,88.328
SCL1: R18.2 U1.15 U2.6 | length 50.5
  Top w0.152: U1.15 19.331,80.334 19.875,79.79 19.875,79.77 24.133,75.512 53.882,75.512 56.65,72.744 R18.2 56.75,72.744 57.536,71.957 57.536,71.21 58.487,70.259 v1(59.638,70.259) ; v1(62.86,72.129) 62.86,72.245 63.329,72.713 U2.6
  Bottom w0.152: v1(59.638,70.259) 61.106,70.259 62.86,72.013 v1(62.86,72.129)
SCL2: R20.2 U1.17 U3.6 | length 65.1
  Top w0.152: U1.17 21.871,80.334 22.415,79.79 22.415,79.77 26.114,76.07 70.938,76.07 74.264,72.744 R20.2 74.364,72.744 75.275,71.833 75.275,70.905 75.689,70.491 v1(77.922,70.491) ; v1(79.676,72.498) 79.891,72.713 U3.6 U3.6@80.908,72.677
  Bottom w0.152: v1(77.922,70.491) 79.676,72.245 v1(79.676,72.498)
SCL3: R22.2 U1.19 U5.6 | length 80.8
  Top w0.152: U1.19 24.785,80.26 24.785,79.94 28.096,76.629 72.115,76.629 72.117,76.627 88.185,76.627 91.566,73.246 91.566,72.956 91.765,72.757 R22.2 92.519,72.757 93.419,71.857 93.419,70.95 93.916,70.452 v1(94.773,70.452) ; v1(98.343,72.591) 98.394,72.641 99.142,72.641 U5.6
  Bottom w0.152: v1(94.773,70.452) 96.254,70.452 98.343,72.541 v1(98.343,72.591)
SCL4: R25.2 U1.21 U6.6 | length 95
  Top w0.152: U1.21 26.951,80.334 27.495,79.79 27.495,79.77 30.077,77.188 105.654,77.188 110.052,72.79 R25.2 110.152,72.79 110.921,72.021 110.921,70.933 111.209,70.645 v1(112.102,70.645) ; v1(115.083,72.013) 115.15,72.08 115.15,72.311 115.552,72.713 U6.6
  Bottom w0.152: v1(112.102,70.645) 112.169,70.712 113.782,70.712 v1(115.083,72.013)
SD_CS: J7.4 U1.31 | length 24.7
  Top w0.152: U1.31 35.138,86.892 v1(36.308,86.892)
  Bottom w0.152: v1(36.308,86.892) 36.402,86.892 36.618,86.677 36.756,86.677 36.864,86.569 36.864,77.193 44.813,69.244 J7.4
SD_MISO: J7.3 U1.30 | length 22.4
  Top w0.152: U1.30 35.11,85.65 v1(36.283,85.65)
  Bottom w0.152: v1(36.283,85.65) 36.283,81.56 36.066,81.343 36.066,77.347 42.313,71.1 J7.3
SD_MOSI: J7.2 U1.26 | length 16.3
  Top w0.152: U1.26 33.398,80.537 v1(33.398,79.411)
  Bottom w0.152: v1(33.398,79.411) 36.474,76.335 36.683,76.335 39.813,73.205 J7.2
SD_SCK: J7.1 U1.25 | length 16.1
  Top w0.152: U1.25 32.033,80.632 v1(32.033,79.372)
  Bottom w0.152: v1(32.033,79.372) 32.616,79.372 34.703,77.285 34.708,77.285 37.313,74.68 J7.1
SDA1: R17.2 U1.16 U2.4 | length 47.2
  Top w0.152: U1.16 20.975,80.26 20.975,79.94 25.124,75.791 55.496,75.791 58.514,72.773 R17.2 59.267,72.773 59.553,73.059 59.553,73.194 60.373,74.013 U2.4
SDA2: R19.2 U1.18 U3.4 | length 62
  Top w0.152: U1.18 23.515,80.26 23.515,79.94 27.105,76.35 71.999,76.35 75.113,73.235 75.113,72.954 75.323,72.744 R19.2 76.077,72.744 77.346,74.013 U3.4
SDA3: R21.2 U1.20 U5.4 | length 77.8
  Top w0.152: U1.20 25.681,80.334 26.225,79.79 26.225,79.77 29.086,76.909 90.192,76.909 90.751,76.35 91.231,76.35 94.17,73.411 R21.2 94.22,72.79 95.422,73.992 U5.4
SDA4: R24.2 U1.22 U6.4 | length 91.7
  Top w0.152: U1.22 28.221,80.334 28.765,79.79 28.765,79.77 31.065,77.47 106.924,77.47 111.622,72.773 R24.2 111.722,72.773 112.962,74.013 U6.4
TFT&TOUCH_MISO: J6.8 U1.8 | length 46.3
  Top w0.152: U1.8 18.399,89.504 19.299,88.605 19.299,83.369 v1(18.733,82.804)
  Bottom w0.152: v1(18.733,82.804) 18.729,82.8 18.729,70.792 23.042,66.479 23.042,56.199 23.902,55.34 29.863,55.34 30.9,56.376 31.865,56.376 J6.8@32.004,56.515
TFT&TOUCH_MOSI: J6.5 U1.4 | length 41.6
  Top w0.152: U1.4 18.399,94.584 19.578,93.405 19.578,83.254 19.431,83.107 v1(19.431,82.296)
  Bottom w0.152: v1(19.431,82.296) 19.431,79.677 19.313,79.559 19.313,70.603 24.382,65.534 J6.5
TFT&TOUCH_SCK: J6.6 U1.24 | length 27.1
  Top w0.152: U1.24 30.761,79.726 v1(32.293,78.194)
  Bottom w0.152: J6.6 26.882,61.923 32.293,67.334 v1(32.293,78.194) 32.293,78.197 v1@32.258,78.232
TFT_BL: Q1.1 R23.1 U1.10 | length 32.7
  Top w0.152: U1.10 17.866,86.964 18.41,86.42 18.43,86.42 18.592,86.259 18.592,84.922 18.718,84.795 v1(18.718,84.701) ; v1(30.353,68.199) 30.353,63.01 Q1.1 30.471,63.019 R23.1
  Bottom w0.152: v1(18.718,84.701) 21.293,84.701 30.407,75.587 30.407,68.253 v1(30.353,68.199)
TFT_CS: J6.2 U1.11 | length 33.8
  Top w0.152: v1(13.649,84.519) 14.824,85.694 U1.11
  Bottom w0.152: v1(13.649,84.519) 13.649,66.002 16.882,62.769 J6.2
TFT_DC: J6.4 U1.23 | length 40.6
  Top w0.152: U1.23 29.491,79.617 30.058,79.617 v1(30.185,79.49)
  Bottom w0.152: J6.4 23.518,54.864 33.058,54.864 33.147,54.953 33.147,78.446 32.815,78.779 30.896,78.779 v1(30.185,79.49)
TFT_LED: J6.7 Q1.3 | length 4.5
  Top w0.152: J6.7 29.382,60.88 Q1.3
TFT_RST: J6.3 U1.29 | length 48.9
  Top w0.152: v1(32.369,85.967) 33.912,84.424 U1.29
  Bottom w0.152: J6.3 18.323,57.559 18.323,63.996 16.342,65.977 16.342,83.909 18.399,85.967 v1(32.369,85.967)
TOUCH_CS: J6.9 U1.9 | length 44.8
  Top w0.152: v1@15.113,73.406 15.072,73.365 15.072,70.496 23.339,62.229 29.424,62.229 32.047,59.606 32.047,58.835 J6.9 ; v1(16.436,87.872) 16.799,88.234 U1.9
  Bottom w0.152: v1(15.072,73.445) 15.072,86.507 v1(16.436,87.872)
Usb1_N: D1.3 R4.2 | length 3.4
  Top w0.152: R4.2 11.941,79.032 12.539,79.63 12.583,79.63 12.734,79.781 13.104,79.781 D1.3
Usb1_P: D1.1 R3.2 | length 3.1
  Top w0.152: R3.2 10.139,80.855 11.576,80.855 11.673,80.952 12.475,80.952 12.498,80.929 12.759,80.929 12.833,80.855 D1.1
UsbData_N: D1.4 U1.13 | length 6.7
  Top w0.152: D1.4 14.714,79.929 14.178,79.929 14.017,80.091 14.017,81.119 14.202,81.305 16.046,81.305 16.54,81.798 16.54,82.449 16.702,82.61 16.803,82.61 16.892,82.7 16.892,82.78 17.266,83.154 U1.13
UsbData_P: D1.6 U1.14 | length 3.2
  Top w0.152: D1.6 16.237,80.855 17.266,81.884 U1.14
VCC: C1.2 C3.1 C11.2 C12.2 C14.2 C16.2 C18.2 D1.5 J1.A4/B9 J1.B4/A9 J2.1 J2.2 J3.1 J3.2 J4.1 J4.2 J5.1 J5.2 U4.3 U4.6 | length 29.4
  Top w0.5: 16.042,70.425 17.088,69.378 U4.6 ; J3.2 71.809,66.603 J3.1 ; J4.2 89.873,66.603 J4.1 ; J5.2 107.724,66.586 J5.1
  Bottom w0.152: J2.2 54.211,64.591 C12.2@54.211,61.08 ; J3.2 71.494,64.878 C14.2@71.494,61.08 ; J4.2 90.077,64.359 C16.2@90.077,61.08 ; J5.2 107.557,64.714 C18.2@107.557,60.697
  other v1: 50.81,64.645 51.61,64.645 52.41,64.645 49.61,65.445 50.41,65.445 51.21,65.445 49.21,66.245 50.01,66.245 50.81,66.245 51.61,66.245 48.01,67.045 48.81,67.045 49.61,67.045 50.41,67.045 51.21,67.045 52.01,67.045 52.81,67.045 47.61,67.845 48.41,67.845 49.21,67.845 50.01,67.845 50.81,67.845 51.61,67.845 52.41,67.845 48.01,68.645 48.81,68.645 49.61,68.645 50.41,68.645 51.21,68.645 52.01,68.645 52.81,68.645 47.61,69.445 48.41,69.445 49.21,69.445 50.01,69.445 50.81,69.445 51.61,69.445 52.41,69.445 53.21,69.445 54.01,69.445 54.81,69.445 48.01,70.245 48.81,70.245 49.61,70.245 50.41,70.245 51.21,70.245 52.01,70.245 52.81,70.245 47.61,71.045 48.41,71.045 49.21,71.045 50.01,71.045 50.81,71.045 51.61,71.045 48.01,71.845 48.81,71.845 49.61,71.845 50.41,71.845 51.21,71.845 47.61,72.645 48.41,72.645 49.21,72.645 50.01,72.645 48.01,73.445 48.81,73.445 49.61,73.445
pads on no net: J1. J1.A8 J1.B8 J2. J3. J4. J5. SW2.A SW2.B' U1.5 U1.6 U1.7 U1.12 U1.28 U1.32 U1.33 U1.34 U1.36 U1.37 U1.38 U1.39 U1.41_10 U1.41_11 U1.41_12 U1.41_13 U1.41_14 U1.41_15 U1.41_16 U1.41_17 U1.41_18 U1.41_19 U1.41_20 U1.41_21 U4.4

## Polygon pours and split planes (outlines as drawn)
VCC on Bottom "NONET_L-01_P-001" (solid, pour order 4): 47.077,74.202 47.473,63.431 108.212,63.569 108.212,64.917 108.861,65.566 108.861,68.961 106.946,68.961 106.357,68.371 106.357,67.05 91.094,67.05 91.094,68.814 88.953,68.814 88.731,68.592 88.731,66.91 73.101,66.913 73.101,66.753 72.988,67.05 72.988,68.814 70.677,68.814 70.677,66.916 55.333,66.916 55.333,74.367
GND on Bottom "NONET_L-01_P-001" (solid, pour order 5): 0,57.705 0,95 cw(c5,95) 5,100 118.571,100 cw(c118.571,95) 123.571,95 123.571,57.705 cw(c118.571,57.705) 118.571,52.705 5,52.705 cw(c5,57.705)
VCC on Bottom "VCC_L02_P006" (solid, pour order 6): 70.46,66.587 70.677,66.804 70.677,68.814 72.311,68.814 72.946,68.178 72.946,66.535
GND on Top "NONET_L-01_P-001" (solid, pour order 1): 24.116,93.059 23.768,93.407 23.768,98.208 19.771,98.208 18.946,99.033 16.356,99.033 16.356,98.15 16.867,97.639 18.629,97.639 19.578,96.045 22.564,93.059 22.498,92.994 22.498,88.525 27.21,88.525 27.21,93.059
3V3 on Top "NONET_L-01_P-001" (solid, remove dead copper, pour order 8): 0,57.705 0,95 cw(c5,95) 5,100 118.571,100 cw(c118.571,95) 123.571,95 123.571,57.705 cw(c118.571,57.705) 118.571,52.705 5,52.705 cw(c5,57.705)
VCC on Top "NONET_L-01_P-001" (solid, pour order 2): 22.957,72.417 42.058,72.417 50.16,64.315 53.619,64.315 54.668,66.342 55.503,67.176 55.503,70.009 53.735,70.009 48.829,74.915 22.957,74.915
GND on Top "NONET_L-01_P-001" (solid, pour order 3): 16.326,72.305 16.326,70.206 25.877,70.206 26.644,70.206 26.644,67.869 28.636,67.869 28.657,67.958 28.657,68.15 28.657,74.427 26.398,74.427 26.398,72.305
VCC on Top "NONET_L-01_P-001" (solid, remove dead copper, pour order 7): 23.983,73.76 19.976,77.766 17.868,77.766 17.868,83.213 3.426,83.213 3.426,70.125 23.983,70.044

## Silkscreen, mask and mechanical layers (free items; w line width, h text height)
Top Overlay:
  text "POWER" at 40.79,98.208 h2
  text "DEBUG" at 41.083,91.918 h2
  text "0" at 53.656,90.172 h3
  text ".Projet_Date" at 72.056,87.799 h0.91
  text ".Projet_nom_du_cours" at 49.399,84.99 h2
  text "Conçu par :" at 55.532,84.65 h2
  text "JLCJLCJLCJLC" at 21.512,83.829 h0.8
  text ".Projet_Concepteur1" at 67.387,83.222 h2
  text ".Projet_Concepteur2" at 68.414,79.114 h2
  text "I2C1" at 56.22,77.218 h2
  text "I2C2" at 73.66,77.218 h2
  text "I2C3" at 91.211,77.218 h2
  text "I2C4" at 108.772,77.218 h2
  text "SD" at 41.756,70.042 h1.52
  text "ECRAN" at 21.393,59.222 h2
Board Outline:
  the board outline again, w0.254

## Text inside footprints (layer, text, board x,y; h text height)
Designator3: Top Paste "181 MM" at -80.729,66.063 h1.78 r90; Top Paste "TOP" at 197.271,133.012 h4 r90; Top Paste "280 MM" at 68.271,-16.988 h1.78 r180; Top Paste "STENCIL THICKNESS -" at 220.571,0.455 h6.5 r90; Top Paste "PCB Revision" at 194.942,31.02 h2 r90
REV1: Bottom Overlay "PCB REV #" at 14.17,96.781 h1
SER1: Bottom Overlay "SERIAL #" at 8.046,97.023 h1
U4: Top Overlay "*" at 23.552,68.997 h1.27 r180; Top 3D Models "*" at 22.308,70.394 h1.27 r180